# Altium PCB PCB1.PcbDoc
Units mm, origin at the board's own origin, x right, y up, seen from the top; angles counter-clockwise.
Board outline 87.88 x 46.61 mm, 2 copper layers (Top Layer, Bottom Layer); 51 components, 37 nets, 155 pads, 0 vias.
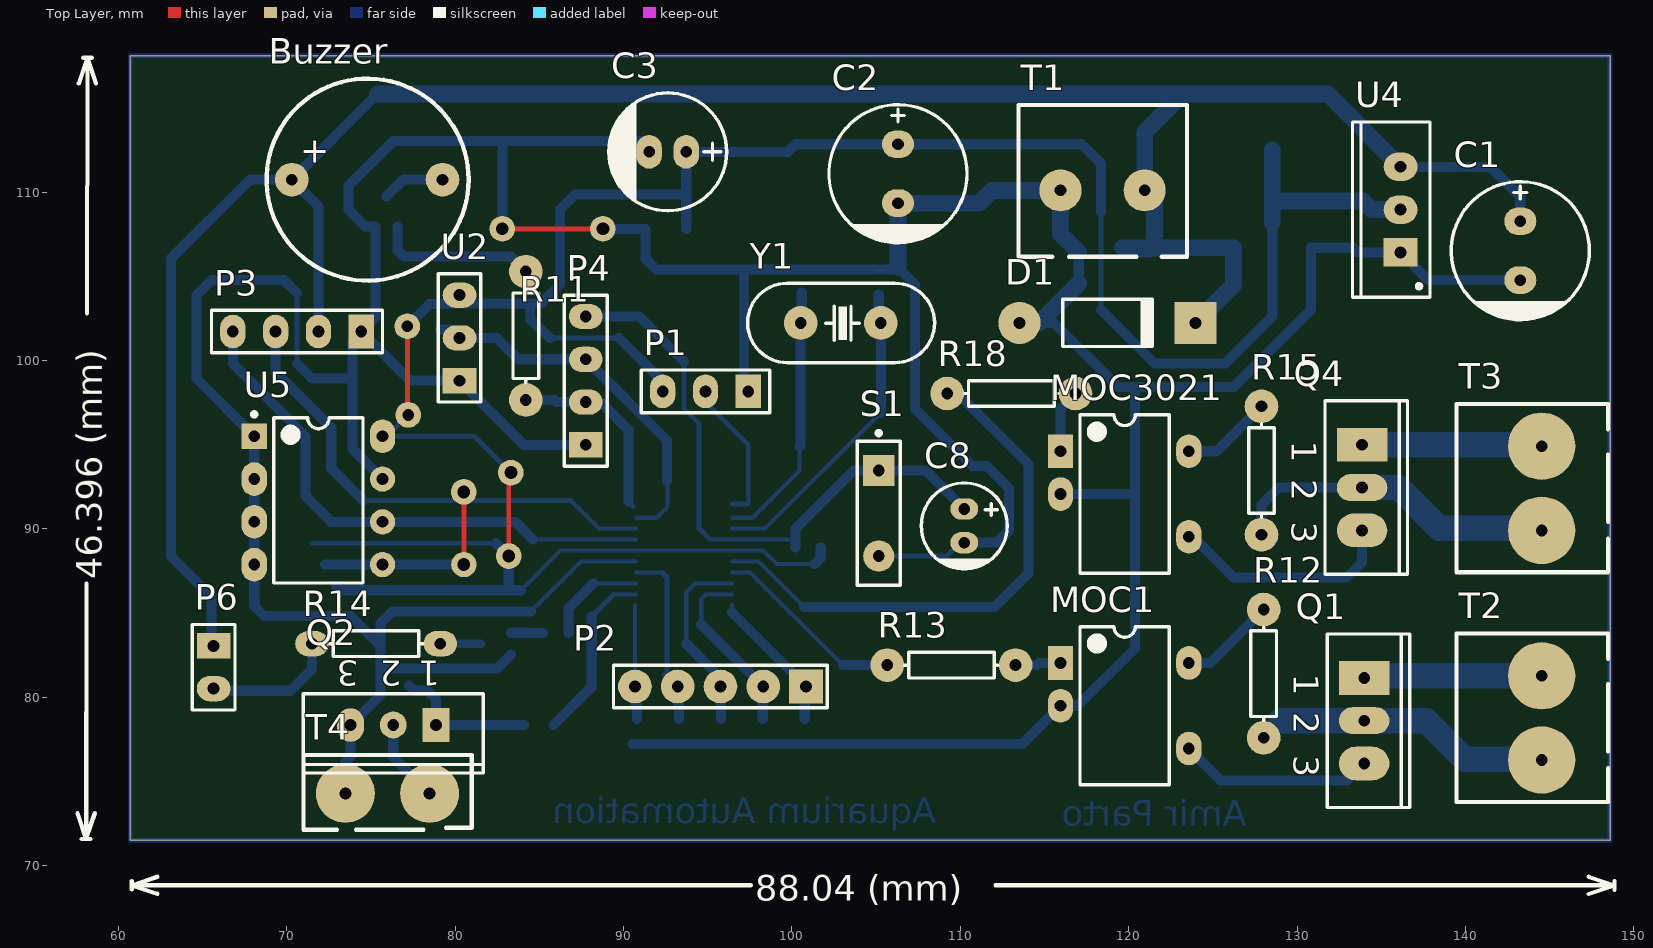
[diagram p0: Top Layer view]
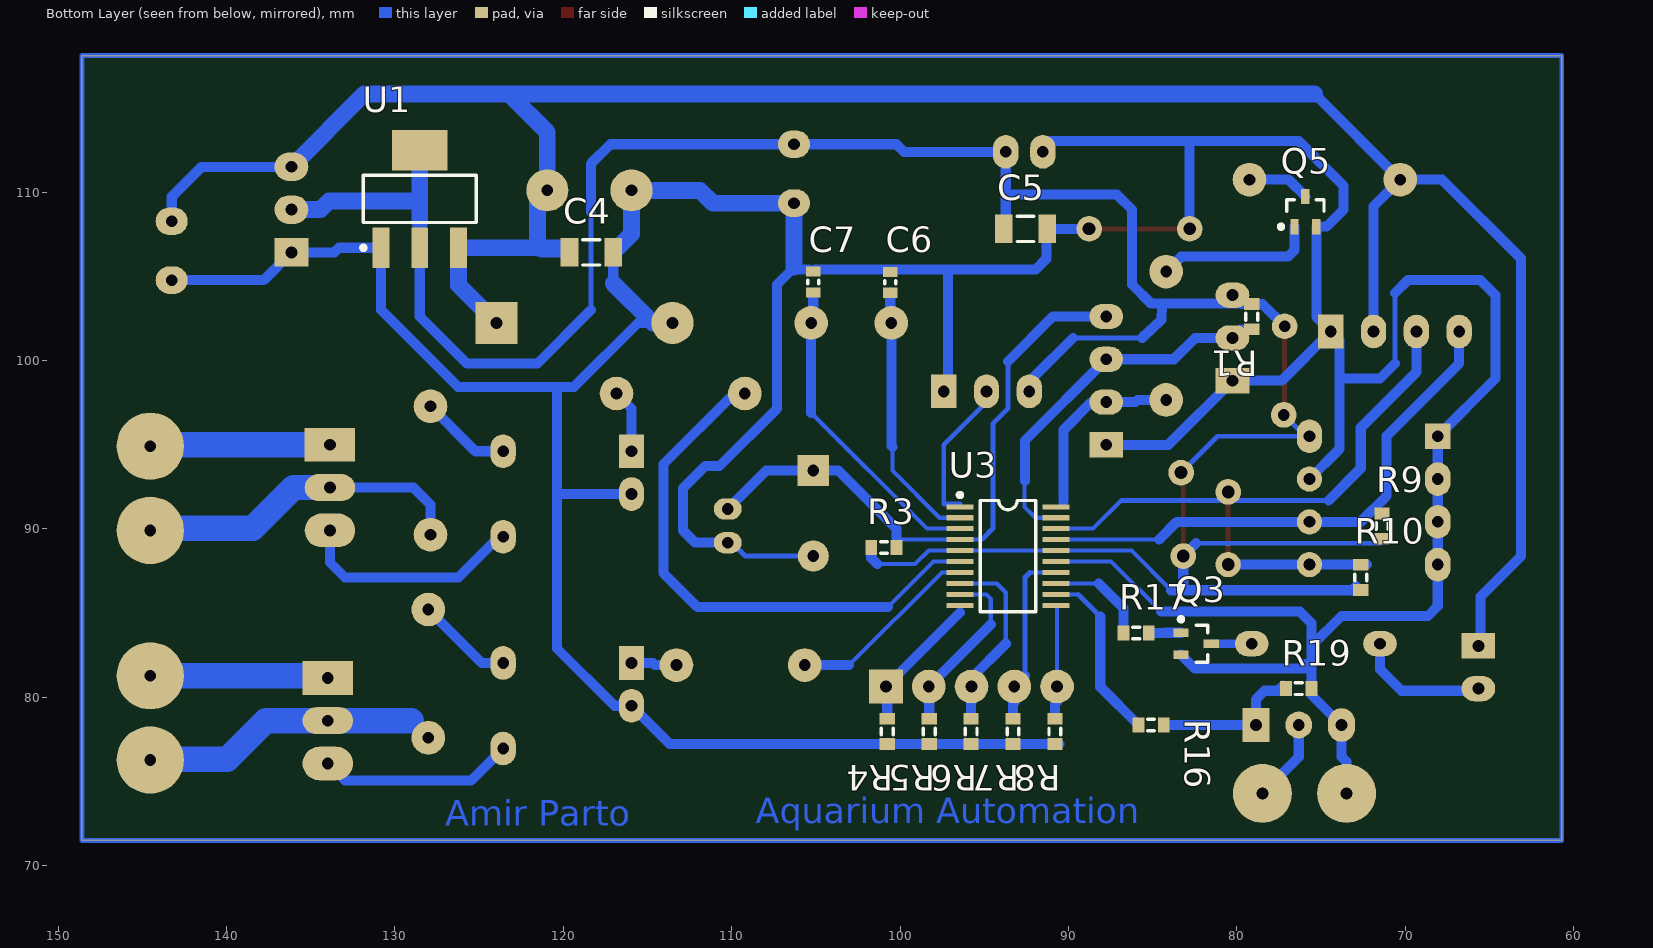
[diagram p1: Bottom Layer view, seen from below]

## Layer stack, top to bottom
Top Solder: solder mask 0.0102, Solder Resist, Dk 3.5
Top Layer: signal copper 0.0356
Dielectric 1: dielectric 0.32, FR-4, Dk 4.8
Bottom Layer: signal copper 0.0356
Bottom Solder: solder mask 0.0102, Solder Resist, Dk 3.5

## Board outline
60.706,118.11 148.59,118.11 148.59,71.501 60.706,71.501

## Design rules (kind name [scope] priority, off if disabled: settings)
Clearance [All] p1: gap=0.372 ignorepadtopadclearanceinfootprint=TRUE
PlaneConnect [All] p1: planeconnectstyle=Direct reliefexpansion=0.508 reliefentries=4 reliefconductorwidth=0.254 reliefairgap=0.254
PolygonConnect [All] p1: connectstyle=Relief reliefconductorwidth=0.254 reliefentries=4 polygonreliefangle="90 Angle" airgapwidth=0.254
RoutingCorners [All] p1: cornerstyle=45-Degree minsetback=1 maxsetback=5.54
RoutingLayers [All] p1: top layer_v5=FALSE bottom layer_v5=TRUE
RoutingPriority [All] p1: routingpriority=4
RoutingVias [All] p1: holewidth=0.711 width=1.3 viastyle="Through Hole" minholewidth=0.711 minwidth=1.27 maxholewidth=0.711 maxwidth=2
SMDNeckDown [All] p1: percent=85.000
SolderMaskExpansion [All] p1: expansion=0.102
UnRoutedNet [All] p1: checkbadconnections=TRUE
Width [All] p1: maxlimit=6 minlimit=0.24 preferedwidth=0.29 toplayer_minwidth=0.254 toplayer_prefwidth=0.26 bottomlayer_maxwidth=5 minimp=50.000000 maximp=50.000000 favimp=50.000000
25 further rules are at their usual default settings.

## Components (designator, comment, footprint, x,y, rotation, side; value= is the part's Value field where it differs from the comment)
Buzzer "Buzzer" BUZZER 74.803,110.744 r0 top
C1 "470uF" "cap 03" 143.256,106.525 r90 top
C2 "470uF" "cap 03" 106.299,111.097 r90 top
C3 "100uF" "cap 02" 92.626,112.395 r0 top
C4 "100nF" SMD_CAP_1206 119.634,106.426 r180 bottom
C5 "100nF" SMD_CAP_1206 93.853,107.823 r180 bottom
C6 "20pF" SMD_CAP_0603 100.584,104.648 r90 bottom
C7 "20pF" SMD_CAP_0603 105.156,104.661 r90 bottom
C8 "100nF" "cap 01" 110.236,90.186 r90 top
D1 "Diode 1N4001" DO-41 118.745,102.235 r0 top
MOC1 "MOC3021-3" DIP-6 119.761,79.502 r0 top
MOC3021 "MOC3021-3" DIP-6 119.761,92.075 r0 top
P1 "Header 3" HDR1X3 97.409,98.171 r180 top
P2 "Header 5" HDR1X5 100.838,80.645 r180 top
P3 "Header 4" HDR1X4 74.422,101.727 r180 top
P4 "SWD" HDR1X4 87.757,94.996 r90 top
P6 "Header 2" HDR1X2 65.659,83.058 r270 top
Q1 "BT139" 221A-09 133.985,78.613 r270 top
Q2 "IRF840LC" TO-220AB 76.327,78.359 r180 top
Q3 "2n3904" SOT323_L 82.423,83.185 r180 bottom
Q4 "BT139" 221A-09 133.858,92.456 r270 top
Q5 "2n3904" SOT323_L 75.931,108.85 r90 bottom
R1 "Res3" J1-0603 79.121,102.604 r90 bottom value=5.1K
R3 "Res3" J1-0603 100.965,88.9 r180 bottom value=4.7K
R4 "Res3" J1-0603 100.762,77.978 r90 bottom value=5.1K
R5 "Res3" J1-0603 98.273,77.978 r90 bottom value=5.1K
R6 "Res3" J1-0603 95.783,77.978 r90 bottom value=5.1K
R7 "Res3" J1-0603 93.294,77.978 r90 bottom value=5.1K
R8 "Res3" J1-0603 90.805,77.978 r90 bottom value=5.1K
R9 "Res3" J1-0603 71.374,90.17 r270 bottom value=5.1K
R10 "Res3" J1-0603 72.644,87.122 r270 bottom value=5.1K
R11 "Res3" AXIAL-0.3#1 84.201,101.473 r90 top value=1K
R12 "Res1" AXIAL-0.3#1 128.016,81.407 r270 top value=1K
R13 "Res1" AXIAL-0.3#1 109.474,81.915 r0 top value=100
R14 "Res1" AXIAL-0.3#2 75.311,83.185 r0 top value=100
R15 "Res1" AXIAL-0.3#1 127.889,93.472 r270 top value=1K
R16 "Res3" J1-0603 85.09,78.359 r0 bottom value=1K
R17 "Res3" J1-0603 85.979,83.82 r0 bottom value=1K
R18 "Res1" AXIAL-0.3#1 113.03,98.044 r0 top value=100
R19 "Res3" J1-0603 76.327,80.518 r180 bottom value=10K
S1 "SW-PB" SPST-2 105.156,90.932 r270 top
T1 "Terminal" "Terminal 1*2"#1 113.458,106.172 r0 top
T2 "Terminal" "Terminal 1*2"#2 148.463,73.787 r90 top
T3 "Terminal" "Terminal 1*2"#2 148.463,87.423 r90 top
T4 "Terminal" "Terminal 1*2"#3 70.993,70.358 r0 top
U1 "LD1117S33TR" SOT-223_N 128.524,109.601 r90 bottom
U2 "DS1820" HDR1X3 80.264,98.806 r90 top
U3 "STM32F030F4" TSSOP20 93.599,88.392 r270 bottom
U4 "LD1085V50" TO220 136.144,108.966 r90 top
U5 "24C02C/P" PDIP300-P8 71.882,91.694 r0 top
Y1 "8 MHz" XTAL 105.283,102.235 r180 top

## Footprints (in the part's own frame and the unit in brackets; to place one, negate y for a bottom-side part, rotate by r counter-clockwise, add the part's x,y. Pads: shape width x height; smd on the part's side, far side on the other; paste and mask are expansions set on the pad)
221A-09 [mm] "TO, Thru-Hole, Vertical, Heatsink Mounted; 3 In-Line Leads; Pitch 2.54 mm"
  rect 2x3 hole 0.7: 1(-2.54,0)
  oval 1.6x3 hole 0.7: 2(0,0)
  oval 2x3 hole 0.7: 3(2.54,0)
  silkscreen extent -5.15,-2.2 5.15,2.7
AXIAL-0.3#1 [mm] "Axial Device, Thru-Hole; 2 Leads; 0.3 in Pin Spacing"
  round 2 hole 0.7: 1(-3.81,0) 2(3.81,0)
  silkscreen extent -2.77,-0.76 2.77,0.76
AXIAL-0.3#2 [mm] "Axial Device, Thru-Hole; 2 Leads; 0.3 in Pin Spacing"
  oval 2x1.5 hole 0.7: 1(-3.81,0) 2(3.81,0)
  silkscreen extent -2.77,-0.76 2.77,0.76
BUZZER [mm] "BUZZER"
  round 2 hole 0.7: 1(-4.5,0) 2(4.45,0)
  silkscreen extent -6,-6 6,6
"cap 01" [mm]
  oval 1.27x1.651 hole 0.7: 1(1,0) 2(-1,0)
  silkscreen extent -2.55,-2.55 2.55,2.55, body extent -2.53,-2.53 2.53,2.53, height 12.54
"cap 02" [mm]
  oval 1.5x2 hole 0.7: 1(1.1,0) 2(-1.1,0)
  silkscreen extent -3.5,-3.5 3.5,3.5
"cap 03" [mm]
  oval 1.651x1.905 hole 0.7: 1(1.75,0) 2(-1.75,0)
  silkscreen extent -4.1,-4.1 4.1,4.1, body extent -4.05,-4.04 4,4.01, height 12.03
DIP-6 [mm] "DIP; 6 Leads; Row Spacing 7.62 mm; Pitch 2.54 mm"
  rect 1.5x2 hole 0.7: 1(-3.81,2.54)
  oval 1.5x2 hole 0.7: 2(-3.81,0) 4(3.81,-2.54) 6(3.81,2.54)
  silkscreen extent -2.65,-4.7 2.65,4.7
DO-41 [mm] "Diode, Axial; Body 5.2 x 2.7 mm (LxDia. max), Lead Dia. 0.86 mm (max)"
  round 2.5 hole 0.7: 1(-5.23,0)
  rect 2.5x2.5 hole 0.7: 2(5.23,0)
  silkscreen extent -2.65,-1.4 2.75,1.4
HDR1X2 [mm]
  rect 1.5x2 hole 0.7: 1(0,0)
  oval 1.5x2 hole 0.7: 2(2.54,0)
  silkscreen extent -1.27,-1.27 3.81,1.27
HDR1X3 [mm] "Connector; Header; 3 Position"
  rect 1.5x2 hole 0.7: 1(0,0)
  oval 1.5x2 hole 0.7: 2(2.54,0) 3(5.08,0)
  silkscreen extent -1.27,-1.27 6.35,1.27
HDR1X4 [mm] "Connector; Header; 4 Position"
  rect 1.5x2 hole 0.7: 1(0,0)
  oval 1.5x2 hole 0.7: 2(2.54,0) 3(5.08,0) 4(7.62,0)
  silkscreen extent -1.27,-1.27 8.89,1.27
HDR1X5 [mm] "Connector; Header; 5 Position"
  rect 2x2 hole 0.7: 1(0,0)
  round 2 hole 0.7: 2(2.54,0) 3(5.08,0) 4(7.62,0) 5(10.16,0)
  silkscreen extent -1.27,-1.27 11.43,1.27
J1-0603 [mm] "Chip Resistor, Body 1.6x0.8mm, IPC High Density"
  rect 0.7x0.9 smd: 1(-0.75,0) 2(0.75,0)
  silkscreen extent -0.2,-0.35 0.2,0.35, body extent -0.85,-0.48 0.85,0.48, height 0.9
PDIP300-P8 [mm] "DIP, 8-Leads, Row Spacing 7.62mm, Pitch 2.54mm, Body 9.5x6.6mm"
  rect 1.5x1.5 hole 0.7: 1(-3.81,3.81)
  oval 1.5x2 hole 0.7: 2(-3.81,1.27) 3(-3.81,-1.27) 4(-3.81,-3.81) 8(3.81,3.81)
  round 1.5 hole 0.7: 5(3.81,-3.81) 6(3.81,-1.27) 7(3.81,1.27)
  silkscreen extent -3.93,-4.9 2.65,5.23, body extent -3.55,-4.9 3.55,4.9, height 5.34
SMD_CAP_0603 [mm]
  rect 0.6x0.85 smd: 1(-0.622,0) 2(0.622,0)
  silkscreen extent -0.1,-0.33 0.1,0.33, body extent -0.76,-0.38 0.76,0.38, height 0.6
SMD_CAP_1206 [mm]
  rect 1.05x1.7 smd: 1(0,0) 2(2.596,0)
  silkscreen extent 0.8,-0.75 1.8,0.75, body extent -0.22,-0.77 2.82,0.75, height 0.75
SOT323_L [mm] "SOT323, 3-Leads, Body 2.0x1.3mm, Pitch 0.65mm, Lead Span 2.1mm, IPC High Density"
  rect 0.9x0.5 smd: 1(-0.9,0.65) 2(-0.9,-0.65) 3(0.9,0)
  silkscreen extent -1.02,-1.1 0.7,1.57, body extent -0.7,-1.1 0.7,1.1, height 1.1
SOT-223_N [mm] "SOT223, 4-Leads, Body 6.5x3.5mm, Pitch 2.3mm, Lead Span 7mm, IPC Medium Density"
  rect 2.4x1 smd: 1(-2.9,2.3) 2(-2.9,0) 3(-2.9,-2.3)
  rect 2.4x3.3 smd: 4(2.9,0)
  silkscreen extent -3.02,-3.35 1.4,3.48, body extent -1.85,-3.35 1.85,3.35, height 1.8
SPST-2 [mm] "Switch; 2 Leads"
  rect 1.85x1.85 hole 0.7: 1(-2.54,0)
  round 1.85 hole 0.7: 2(2.54,0)
  silkscreen extent -4.89,-1.27 4.28,1.27
"Terminal 1*2"#1 [mm]
  round 2.5 hole 0.7: 1(2.493,3.937) 2(7.493,3.937)
  silkscreen extent 0,0 10,9
"Terminal 1*2"#2 [mm]
  round 4 hole 0.7: 1(2.493,3.937) 2(7.493,3.937)
  silkscreen extent 0,0 10,9
"Terminal 1*2"#3 [mm]
  round 3.5 hole 0.7: 1(2.493,3.937) 2(7.493,3.937)
  silkscreen extent 0,1.78 10,6.22
TO220 [mm] "TO, Thru-Hole, Vertical, Heatsink Mounted; 3 In-Line Leads; Pitch 2.54 mm"
  rect 1.7x2 hole 0.7: 1(-2.54,0)
  oval 1.7x2 hole 0.7: 2(0,0) 3(2.54,0)
  silkscreen extent -5.2,-1.75 5.2,2.85, body extent -5.25,-1.8 5.25,2.9, height 19.7
TO-220AB [mm] "TO, Thru-Hole, Vertical, Heatsink Mounted; 3 In-Line Leads; Pitch 2.54 mm"
  rect 1.6x2 hole 0.7: 1(-2.54,0)
  round 1.6 hole 0.7: 2(0,0)
  oval 1.6x2 hole 0.7: 3(2.54,0)
  silkscreen extent -5.35,-1.85 5.35,2.85
TSSOP20 [mm] "Shrink Small Outline; 20 Leads; Body Width 4.4 mm; Pitch 0.65 mm"
  rect 0.3x1.6 smd: 1(-2.925,-2.85) 2(-2.275,-2.85) 3(-1.625,-2.85) 4(-0.975,-2.85) 5(-0.325,-2.85) 6(0.325,-2.85) 7(0.975,-2.85) 8(1.625,-2.85) 9(2.275,-2.85) 10(2.925,-2.85) 11(2.925,2.85) 12(2.275,2.85) 13(1.625,2.85) 14(0.975,2.85) 15(0.325,2.85) 16(-0.325,2.85) 17(-0.975,2.85) 18(-1.625,2.85) 19(-2.275,2.85) 20(-2.925,2.85)
  silkscreen extent -3.75,-2.97 3.3,1.65
XTAL [mm]
  round 2 hole 0.7: 1(0,0) 2(4.76,0)
  silkscreen extent -3.19,-2.36 7.91,2.36, body extent -3.32,-2.38 8.03,2.42, height 13.06

## Part data
C1 C2 C3 C8: library part Cap-Polar, "Polar Capacitor", Voltage=16V, Adding Date=1387/12/20, Designer="Saeid Jorablo", Organazation=ControTec
C4 C5 C6 C7: library part Cap-Bipolar, "Bipolar Capacitor", Voltage=100V, Adding Date=1387/12/20, Designer="Saeid Jorablo", Organazation=ControTec
D1: "1 Amp General Purpose Rectifier", Code_JEDEC=DO-204-AL, ComponentLink1Description="Manufacturer Link", ComponentLink1URL=http://www.fairchildsemi.com/, ComponentLink2Description=Datasheet, ComponentLink2URL=http://www.fairchildsemi.com/ds/1N%2F1N4001.pdf, DatasheetVersion=1998, LatestRevisionDate=17-Jul-2002, LatestRevisionNote="Re-released for DXP Platform.", PackageDescription="Diode, Axial; Body 5.2 x 2.7 mm (LxDia. max), Lead Dia. 0.86 mm (max)", PackageReference=DO-41, PackageVersion=Aug-1999, Published=8-Jun-2000, Publisher="Altium Limited"
MOC1 MOC3021: "Opto-Triac", Designer="Seyed Mohsen Ghasemian", E-mail=picpars@gmail.com, LatestRevisionDate=17-11-2011, Published=17-11-2011, Publisher=www.picpars.com, WEB=www.picpars.com
P1: "Header, 3-Pin", LatestRevisionDate=17-Jul-2002, LatestRevisionNote="Re-released for DXP Platform.", Publisher="Altium Limited"
P2: "Header, 5-Pin", LatestRevisionDate=17-Jul-2002, LatestRevisionNote="Re-released for DXP Platform.", Publisher="Altium Limited"
P3: "Header, 4-Pin", LatestRevisionDate=17-Jul-2002, LatestRevisionNote="Re-released for DXP Platform.", Publisher="Altium Limited"
P4: library part "Header 4", "Header, 4-Pin", LatestRevisionDate=17-Jul-2002, LatestRevisionNote="Re-released for DXP Platform.", Publisher="Altium Limited"
P6: "Header, 2-Pin", LatestRevisionDate=17-Jul-2002, LatestRevisionNote="Re-released for DXP Platform.", Publisher="Altium Limited"
Q1 Q4: library part MAC15A6, "Silicon Bidirectional Triode Thyristor", Code_JEDEC=TO-262-AA, ComponentLink1Description="Manufacturer Link", ComponentLink1URL=http://www.onsemi.com/site/products/landing?taxonomyID=194, ComponentLink2Description=Datasheet, ComponentLink2URL=http://www.onsemi.com/pub/Collateral/MAC15A4-D.PDF, DatasheetVersion=1999, LatestRevisionDate=17-Jul-2002, LatestRevisionNote="Re-released for DXP Platform.", Note="Pin 2 is electrically connected to Pin 4 (TAB)", PackageDescription="TO, Thru-Hole, Vertical, Heatsink Mounted; 3 In-Line Leads; Pitch 2.54 mm", PackageReference=221A-09, PackageVersion=1997, Published=29-Sep-2000, Publisher="Altium Limited"
Q2: "HEXFET Power MOSFET", ComponentLink1Description="Manufacturer Link", ComponentLink1URL=http://www.irf.com/, ComponentLink2Description=Datasheet, ComponentLink2URL=http://www.irf.com/product-info/datasheets/data/irf840lc.pdf, DatasheetVersion=PD-9.1069, LatestRevisionDate=17-Jul-2002, LatestRevisionNote="Re-released for DXP Platform.", Note="Pin 2 is electrically connected to pin 4.", PackageDescription="TO, Thru-Hole, Vertical, Heatsink Mounted; 3 In-Line Leads; Pitch 2.54 mm", PackageReference=TO-220AB, PackageVersion=Feb-1997, Published=8-Jun-2000, Publisher="Altium Limited"
Q3 Q5: library part PMST2222, "NPN Switching Transistor", ComponentLink1Description="Manufacturer Link", ComponentLink1URL=http://www.semiconductors.philips.com/, ComponentLink2Description=Datasheet, ComponentLink2URL=http://www.semiconductors.philips.com/acrobat/datasheets/PMST2222_2222A_2.pdf, DatasheetVersion=22-Apr-1999, LatestRevisionDate=12-Dec-2006, LatestRevisionNote="IPC-7351 Footprint Added.", PackageDescription="3-Pin SOT-323 Package 0.65 mm Pitch, 2.1 mm Lead Span", PackageReference=SOT323, PackageVersion=Apr-1999, Published=17-Sep-2003, Publisher="Altium Limited"
R1 R3 R4 R5 R6 R7 R8 R9 R10 R11 R12 R13 R14 R15 R16 R17 R18 R19: "Resistor", Published=8-Jun-2000, Publisher="Altium Limited"
  R1 R3 R4 R5 R6 R7 R8 R9 R10 R11 R16 R17 R19: LatestRevisionDate=29-May-2009, LatestRevisionNote="IPC-7351 Footprint Added.", PackageDescription="Chip Resistor", PackageReference=J1-0603
  R12 R13 R14 R15 R18: LatestRevisionDate=17-Jul-2002, LatestRevisionNote="Re-released for DXP Platform.", PackageDescription="Axial Device, Thru-Hole; 2 Leads; 0.3 in Pin Spacing", PackageReference=AXIAL-0.3
S1: "Switch", LatestRevisionDate=17-Jul-2002, LatestRevisionNote="Re-released for DXP Platform.", PackageDescription="Switch; 2 Leads", PackageReference=SPST-2, Published=24-Mar-1999, Publisher="Altium Limited"
T1 T2 T3 T4: library part "Terminal 1*2", "Terminal 2 Pin 250VAC 16A", ComponentLinkURL=www.picpars.com, Designer="Seyed Mohsen Ghasemain", E-mail=picpars@gmail.com
U1: "Fixed Low Drop Positive Voltage Regulator, 3.3V, 4-Pin SOT-223, Tape and Reel", ComponentLink1Description="Manufacturer URL", ComponentLink1URL=http://www.st.com, ComponentLink2Description=Datasheet, ComponentLink2URL=http://www.st.com/internet/com/TECHNICAL_RESOURCES/TECHNICAL_LITERATURE/DATASHEET/CD00000544.pdf, DatasheetVersion=Nov-2011, PackageDescription="4-Pin SOT-223 Package, 6.5 x 3.5 mm Body, 2.3 mm Pitch, 7 mm Lead Span", PackageReference=SOT-223, PackageVersion=2010, PartNumber=LD1117S33TR
U2: "1-Wire Digital Thermometer", ComponentAvailability=Obsolete, ComponentLink1Description="Manufacturer Link", ComponentLink1URL=http://www.maxim-ic.com/, ComponentLink2Description=Datasheet, ComponentLink2URL=http://pdfserv.maxim-ic.com/en/ds/DS1820-DS1820S.pdf, ComponentLink3Description="Discontinuation Notice", ComponentLink3URL=http://www.maxim-ic.com/qa/pdfs/non-obsolescence-letter.pdf, DatasheetVersion=5-Mar-1998, LatestRevisionDate=17-Jul-2002, LatestRevisionNote="Re-released for DXP Platform.", PackageDescription="TO, Flat Index; 3 In-Line, Axial Leads; Body Dia. 4.6mm; Leads 0.56 x 0.51 mm (max)", PackageReference=PR35, PackageVersion=1999, Published=13-Oct-2000, Publisher="Altium Limited"
U3: "STM32 ARM-based 32-bit MCU"
U4: "3A, Low Drop Positive Voltage Regulator, 5V, 3-Pin TO-220", ComponentLink1Description="Manufacturer URL", ComponentLink1URL=http://www.st.com, ComponentLink2Description=Datasheet, ComponentLink2URL=http://www.st.com/internet/com/TECHNICAL_RESOURCES/TECHNICAL_LITERATURE/DATASHEET/CD00001883.pdf, ComponentLink3Description="Package Specification", ComponentLink3URL=http://www.st.com/internet/com/TECHNICAL_RESOURCES/TECHNICAL_LITERATURE/PACKAGE_INFORMATION/CD00004649.pdf, DatasheetVersion=Jul-2009, PackageDescription="TO, Thru-Hole, Vertical, Heatsink Mounted; 3 In-Line Leads; Pitch 2.54 mm", PackageReference=TO220, PackageVersion=ver3.0, PartNumber=LD1085V50
U5: "2Kbit, 400kHz, 5V, I2C Serial EEPROM, 8-Pin PDIP, Commercial Temperature", Code_JEDEC=MS-001, ComponentLink1Description="Manufacturer Link", ComponentLink1URL=http://www.microchip.com, ComponentLink2Description=Datasheet, ComponentLink2URL=http://ww1.microchip.com/downloads/en/DeviceDoc/21202J.pdf, ComponentLink3Description="Packaging Specification", ComponentLink3URL=http://ww1.microchip.com/downloads/en/PackagingSpec/00049AW.pdf, DatasheetVersion="revJ, Aug-2008", PackageDescription="8-Lead Plastic Dual In-Line (P) - 300 mil Body [PDIP]", PackageReference=PDIP300-P8, PackageVersion="revAW, Oct-2008", Published=29-Jan-2009, Publisher="Altium Limited"
Y1: library part XTAL, "XTAL Crystal", Company=E.P.I.L, Design Date=11/04/2011
Buzzer: ComponentLinkURL=www.picpars.com, Designer="Seyed Mohsen Ghasemain"

## Free pads (board coordinates)
  round 1.524 hole 0.7: 2(77.164,102.033) 4(77.216,96.774)
  round 1.524 hole 0.762: 5(80.518,92.202) 7(83.185,88.392) 9(83.312,93.345) 10(88.773,107.823) 11(82.804,107.823)
  round 1.5 hole 0.762: 6(80.518,87.884)

## Nets (pads, with @x,y where several pads share a name; then routed paths per layer and width w, separated by ;. In a path a pad name is that pad's centre, name@x,y a point inside that pad or via, vN(x,y) a via of type N, cw(c..) or ccw(c..) an arc to the next point about the centre after c; other vN are vias at no path point)
+5V: Buzzer.1 C1.1 C4.1 D1.2 P3.2 P6.1 T1.2 U1.3 U4.3 | length 146.1
  Bottom Layer w0.6: P6.1@65.532,83.312 65.532,85.979 63.119,88.392 63.119,106.045 67.818,110.744 Buzzer.1 ; P3.2 71.882,109.165 Buzzer.1 ; 75.383,115.824 Buzzer.1 ; C4.1 121.285,106.426 121.539,106.68 ; T1.2 T1.2@121.539,110.109 ; U4.3 141.478,111.506 143.256,109.728 C1.1
  Bottom Layer w1: 75.383,115.824 131.826,115.824 U4.3 ; C4.1@119.634,106.701 U1.3 126.224,104.484 D1.2 ; T1.2 120.951,113.56 123.139,115.748 ; 121.539,106.68 T1.2@121.539,110.109
BTN_Down: P2.1 R4.2 U3.10 | length 8.6
  Bottom Layer w0.244: 96.444,85.039 U3.10@96.444,85.467
  Bottom Layer w0.6: 96.444,85.039 P2.1 100.838,79.705 100.762,79.629 R4.2
BTN_Enter: P2.2 R5.2 U3.9 | length 10.6
  Bottom Layer w0.244: 94.615,84.328 94.615,85.852 94.88,86.117 U3.9
  Bottom Layer w0.6: 94.615,84.328 P2.2 98.298,79.68 98.273,79.654 R5.2
BTN_Light: P2.4 R7.2 U3.14 | length 10.6
  Bottom Layer w0.244: U3.14 92.288,87.417
  Bottom Layer w0.3: 92.288,87.417 92.583,87.122 P2.4@92.583,81.28
  Bottom Layer w0.6: P2.4@92.583,81.28 P2.4 93.218,79.705 93.294,79.629 R7.2
BTN_Pomp: P2.3 R6.2 U3.8 | length 11.3
  Bottom Layer w0.244: 93.726,83.185 93.726,86.233 94.26,86.767 U3.8
  Bottom Layer w0.6: 93.726,83.185 95.758,81.153 P2.3 95.758,79.68 95.783,79.654 R6.2
BTN_Up: P2.5 R8.2 U3.11 | length 6.8
  Bottom Layer w0.244: P2.5 U3.11@90.678,85.467
  Bottom Layer w0.6: P2.5 90.678,79.731 90.805,79.604 R8.2
Buzzer: P4.2 R11.1 U3.20 | length 11.5
  Bottom Layer w0.244: 90.29,91.627 U3.20@90.6,91.317
  Bottom Layer w0.6: R11.1 85.903,97.663 86.03,97.536 P4.2 88.646,97.536 90.29,95.892 90.29,91.627
DS18B20: P4.3 R1.1 U2.2 U3.19 | length 22.3
  Bottom Layer w0.244: U3.19 91.962,90.667 92.608,91.313 92.608,92.812 92.583,92.837
  Bottom Layer w0.6: R1.1 79.756,101.854 U2.2 82.474,101.346 83.744,100.076 P4.3 92.583,95.25 92.583,92.837
GND: C1.2 C2.2 C3.2 C4.2 C5.2 C6.2 C7.2 C8.2 D1.1 MOC1.2 MOC3021.2 P1.1 P3.1 P4.1 pad.10 pad.11 Q2.3 Q3.2 Q5.2 R4.1 R5.1 R6.1 R7.1 R8.1 R19.2 S1.2 T1.1 T4.1 U1.1 U2.1 U3.15 U4.1 U5.1 U5.2 U5.3 U5.4 U5.7 | length 310.9
  Top Layer w0.29: pad.11 pad.10@88.519,107.823
  Bottom Layer w0.244: 84.493,85.09 87.47,88.067 U3.15
  Bottom Layer w0.29: 70.612,99.822 70.612,104.013 ; pad.10@88.519,107.823 pad.10 ; S1.2 109.204,88.392 C8.2@109.982,89.17
  Bottom Layer w0.6: 70.612,99.822 71.501,98.933 73.914,98.933 ; 70.612,104.013 69.85,104.775 65.532,104.775 64.643,103.886 64.643,98.933 U5.1 U5.2 U5.3 U5.4 68.072,85.42 68.656,84.836 73.787,84.836 75.565,83.058 ; T4.1 73.486,76.175 73.787,76.476 Q2.3 75.565,80.137 75.565,81.585 ; U5.7 73.914,94.742 73.914,98.933 ; 75.946,81.712 82.5,81.712 Q3.2 ; 75.946,81.966 75.565,81.585 ; pad.11 82.804,113.03 ; 84.493,85.09 76.251,85.09 75.565,84.404 75.565,83.058 ; P4.1 84.074,94.996 U2.1 77.343,98.806 P3.1 ; pad.10 C5.2 ; R8.1@90.551,77.228 R8.1 R7.1 R6.1 R5.1 R4.1 113.677,77.228 MOC1.2 116.967,79.502 120.371,82.906 120.371,92.075 ; C5.2@91.313,107.823 91.313,106.045 91.961,105.397 97.155,105.397 ; C3.2 91.526,113.03 82.804,113.03 ; P1.1@97.536,98.552 97.155,98.933 97.155,105.397 ; C7.2@105.042,105.397 100.584,105.397 100.575,105.397 97.155,105.397 ; C7.2@105.41,105.41 106.426,105.41 107.315,104.521 107.315,97.142 110.722,93.735 111.569,93.735 112.903,92.402 112.903,89.916 112.173,89.186 C8.2 ; D1.1 114.681,102.235 115.57,102.235 119.38,98.425 120.371,98.425 ; MOC3021.2 120.371,92.075 ; 117.038,104.592 C4.2 ; C1.2 137.795,104.775 U4.1 133.6,106.426 133.325,106.701 U1.1 130.824,103.011 126.238,98.425 120.371,98.425 ; 73.914,98.933 73.914,101.219 P3.1 ; P3.1 75.281,102.586 Q5.2 74.676,107.95 73.66,108.966 73.66,110.363 76.327,113.03 82.804,113.03 ; 75.565,81.585 75.565,83.058 ; 120.371,92.075 120.371,98.425
  Bottom Layer w1: 106.299,105.537 C2.2@106.299,108.839 ; C2.2 111.125,109.347 111.887,110.109 T1.1 115.951,107.513 C4.2 ; D1.1@114.681,102.235 117.038,104.592
Heater: R18.1 U3.6 | length 32.6
  Bottom Layer w0.244: U3.6 98.013,88.067 100.71,85.369
  Bottom Layer w0.6: 100.71,85.369 112.039,85.369 114.046,87.376 114.046,93.853 109.855,98.044 R18.1
IR_Transmitter: R17.2 U3.13 | length 6.1
  Bottom Layer w0.244: 88.205,86.767 U3.13
  Bottom Layer w0.6: R17.2 86.729,85.291 88.205,86.767
Light_PWM: R16.2 U3.12 | length 10.6
  Bottom Layer w0.244: 89.433,86.117 U3.12
  Bottom Layer w0.3: 88.113,84.796 89.433,86.117
  Bottom Layer w0.6: R16.2 88.113,80.632 88.113,84.796
NetBuzzer_2: Buzzer.2 Q5.3 | length 3.7
  Bottom Layer w0.6: Q5.3 76.925,110.744 Buzzer.2
NetC6_1: C6.1 U3.2 Y1.2 | length 15.8
  Bottom Layer w0.244: U3.2 97.652,90.667 100.457,93.472 100.457,94.869
  Bottom Layer w0.6: 100.457,94.869 100.523,94.935 Y1.2 100.523,103.099 100.584,103.16 C6.1
NetC7_1: C7.1 U3.3 Y1.1 | length 18.7
  Bottom Layer w0.244: U3.3 98.399,90.017 105.283,96.901
  Bottom Layer w0.6: C7.1@105.156,103.912 105.156,103.124 105.283,102.997 Y1.1 105.283,96.901
NetMOC1_1: MOC1.1 R13.2 | length 2.7
  Bottom Layer w0.6: R13.2 114.554,81.915 114.681,82.042 MOC1.1
NetMOC1_4: MOC1.4 Q1.3 | length 11.6
  Bottom Layer w0.6: MOC1.4 125.476,75.057 132.969,75.057 Q1.3
NetMOC1_6: MOC1.6 R12.1 | length 5.8
  Bottom Layer w0.6: MOC1.6 124.841,82.042 R12.1
NetMOC3021_1: MOC3021.1 R18.2 | length 3.8
  Bottom Layer w0.6: MOC3021.1 115.951,97.155 R18.2
NetMOC3021_4: MOC3021.4 Q4.3 | length 13.6
  Bottom Layer w0.6: MOC3021.4 123.825,89.535 126.238,87.122 132.969,87.122 133.858,88.011 Q4.3
NetMOC3021_6: MOC3021.6 R15.1 | length 5.4
  Bottom Layer w0.6: MOC3021.6 125.222,94.615 R15.1
NetP1_2: P1.2 U3.1 | length 8.3
  Bottom Layer w0.29: P1.2@94.996,97.79 94.996,97.409 97.409,94.996 97.409,91.484 96.449,91.484
NetP6_2: P6.2 R14.1 | length 8
  Bottom Layer w0.6: P6.2@65.532,80.391 70.231,80.391 71.501,81.661 R14.1
NetQ1_1: Q1.1 T2.2 | length 10.6
  Bottom Layer w0.6: Q1.1 Q1.1@134.112,81.28
  Bottom Layer w1.5: Q1.1@134.112,81.28 T2.2
NetQ1_2: Q1.2 R12.2 T2.1 | length 20.3
  Bottom Layer w0.6: R12.2 129.032,78.613 ; T2.1@142.875,76.327 144.526,77.978 T2.1
  Bottom Layer w1.5: 129.032,78.613 137.668,78.613 139.954,76.327 T2.1@142.875,76.327
NetQ2_1: Q2.1 R16.1 R19.1 | length 8.7
  Bottom Layer w0.6: R19.1@77.262,80.703 77.573,80.391 78.359,80.391 78.867,79.883 Q2.1 81.458,78.359 81.47,78.347 R16.1@84.074,78.347
NetQ2_2: Q2.2 T4.2 | length 5
  Bottom Layer w0.6: Q2.2 76.327,76.454 T4.2
NetQ3_1: Q3.1 R17.1 | length 1.9
  Bottom Layer w0.6: Q3.1 84.252,83.835 84.267,83.82 R17.1
NetQ3_3: Q3.3 R14.2 | length 2.4
  Bottom Layer w0.5: R14.2 Q3.3
NetQ4_1: Q4.1 T3.2 | length 10.7
  Bottom Layer w1.5: Q4.1 144.446,94.996 T3.2
NetQ4_2: Q4.2 R15.2 T3.1 | length 18.1
  Bottom Layer w0.6: R15.2 127.889,91.44 128.905,92.456 Q4.2
  Bottom Layer w1.5: Q4.2 136.017,92.456 138.43,90.043 T3.1@142.748,90.043
NetQ5_1: Q5.1 R11.2 | length 9.5
  Bottom Layer w0.6: Q5.1 76.581,106.553 76.962,106.172 83.312,106.172 R11.2
NRESET: C8.1 P4.4 R3.2 S1.1 U3.4 | length 36.8
  Bottom Layer w0.244: 95.123,89.392 95.148,89.367 U3.4 100.215,89.367
  Bottom Layer w0.29: 93.599,99.949 93.599,97.141 94.488,96.252 94.488,90.027 95.123,89.392
  Bottom Layer w0.6: P4.4 90.932,102.616 93.599,99.949 ; R3.2 100.215,89.367 100.215,90.018 103.669,93.472 S1.1 107.95,93.472 C8.1
Pomp: R13.1 U3.7 | length 11.5
  Bottom Layer w0.244: U3.7 97.522,87.417 103.024,81.915
  Bottom Layer w0.6: 103.024,81.915 R13.1
SCL: P3.4 R9.1 U3.17 U5.6 | length 32.3
  Bottom Layer w0.244: 84.623,89.367 U3.17
  Bottom Layer w0.6: P3.4 66.802,99.822 71.12,95.504 71.12,91.948 72.644,90.424 U5.6 83.566,90.424 84.623,89.367
SDA: P3.3 pad.5 pad.6 R10.1 U3.18 U5.5 | length 41.7
  Top Layer w0.29: pad.6 pad.5@80.518,91.694
  Bottom Layer w0.244: 86.868,91.694 88.545,90.017 U3.18
  Bottom Layer w0.29: 74.549,91.694 pad.5@80.518,91.694 ; pad.5 pad.5@80.518,91.694 ; 86.868,91.694 pad.5@80.518,91.694
  Bottom Layer w0.6: P3.3 69.342,99.314 72.644,96.012 72.644,93.599 74.549,91.694 ; R10.1@72.263,87.884 pad.6
VCC: C2.1 C3.1 C5.1 P1.3 pad.2 pad.4 pad.7 pad.9 R1.2 R3.1 R9.2 R10.2 U1.2 U1.4 U2.3 U3.5 U3.16 U4.2 U5.8 | length 168.7
  Top Layer w0.29: pad.4@77.164,96.774 pad.2 ; pad.7 pad.9@83.185,93.472
  Bottom Layer w0.244: 83.902,86.36 86.259,88.717 U3.16 U3.5 98.299,88.717 99.107,87.909 101.346,87.909
  Bottom Layer w0.29: R9.2@71.501,89.154 82.423,89.154 ; U5.8 U5.8@75.946,95.504 ; pad.4 U5.8@75.946,95.504 ; pad.9@83.185,93.472 81.153,95.504 U5.8@75.946,95.504 ; 85.622,101.346 89.738,101.346
  Bottom Layer w0.3: 118.364,102.997 118.364,108.839
  Bottom Layer w0.6: R10.2@72.923,86.614 73.177,86.36 83.902,86.36 ; pad.2 78.486,103.354 R1.2 79.732,103.354 80.645,103.378 85.09,103.378 86.233,104.521 86.233,108.966 87.122,109.855 93.599,109.855 93.726,109.982 ; 82.423,89.154 pad.7 83.185,86.36 ; 84.455,103.251 84.48,102.42 85.622,101.346 ; 89.738,101.346 92.075,99.009 P1.3@92.075,98.272 ; C5.1@93.726,107.823 C3.1 99.771,112.395 100.223,112.847 C2.1 117.201,112.847 118.364,111.684 118.364,108.839 ; 101.346,87.909 101.715,88.278 R3.1 ; 118.364,102.997 121.539,99.822 125.73,99.822 128.524,102.616 U1.2 128.524,109.474
  Bottom Layer w1: 128.524,108.204 U1.4 ; 128.524,109.474 133.921,109.474 134.429,108.966 U4.2
copper on no net: | length 269
  Bottom Layer w0.29: 60.706,71.501 60.706,118.11 148.59,118.11 148.59,71.501 60.706,71.501

## Other copper
Bottom Layer:
  text "Aquarium Automation" at 108.585,72.517 h1.52
  text "Amir Parto" at 127,72.39 h1.52

## Silkscreen, mask and mechanical layers (free items; w line width, h text height)
Top Overlay:
  lines w0.254: 57.583,73.112 58.088,71.587 ; 57.655,116.46 58.166,117.983 ; 57.834,71.588 58.342,71.587 ; 57.912,117.983 58.42,117.983 ; 58.114,86.761 58.088,71.587 ; 58.14,102.809 58.166,117.983 ; 58.599,73.111 58.088,71.587 ; 58.671,116.458 58.166,117.983 ; 60.804,68.585 60.804,69.093 ; 62.328,68.331 60.804,68.839 ; 62.328,69.347 60.804,68.839 ; 97.562,68.837 60.804,68.839 ; 112.086,68.836 148.844,68.834 ; 147.32,68.326 148.844,68.834 ; 147.32,69.342 148.844,68.834 ; 148.844,68.58 148.844,69.088
  text "46.396 (mm)" at 59.028,87.014 h1.52 r89.9
  text "88.04 (mm)" at 97.816,67.923 h1.52

## Text inside footprints (layer, text, board x,y; h text height)
Buzzer: Top Overlay "+" at 70.803,111.744 h1.52
Q1: Top Overlay "1" at 129.81,81.403 h1.5 r270; Top Overlay "2" at 129.81,79.113 h1.5 r270; Top Overlay "3" at 129.81,76.573 h1.5 r270
Q2: Top Overlay "2" at 76.827,82.184 h1.5 r180; Top Overlay "1" at 79.117,82.184 h1.5 r180; Top Overlay "3" at 74.287,82.184 h1.5 r180
Q4: Top Overlay "1" at 129.683,95.246 h1.5 r270; Top Overlay "2" at 129.683,92.956 h1.5 r270; Top Overlay "3" at 129.683,90.416 h1.5 r270